# Altium PCB Embeded MCU.PcbDoc
Units mm, origin at the board's own origin, x right, y up, seen from the top; angles counter-clockwise.
Board outline 76.9 x 76.9 mm, 4 copper layers (Top Layer, Int1 (GND), Int2 (PWR), Bottom Layer), stack 1.369 mm thick; 202 components, 107 nets, 1038 pads, 0 vias.
Unrouted connection lines stored in the file: 393.
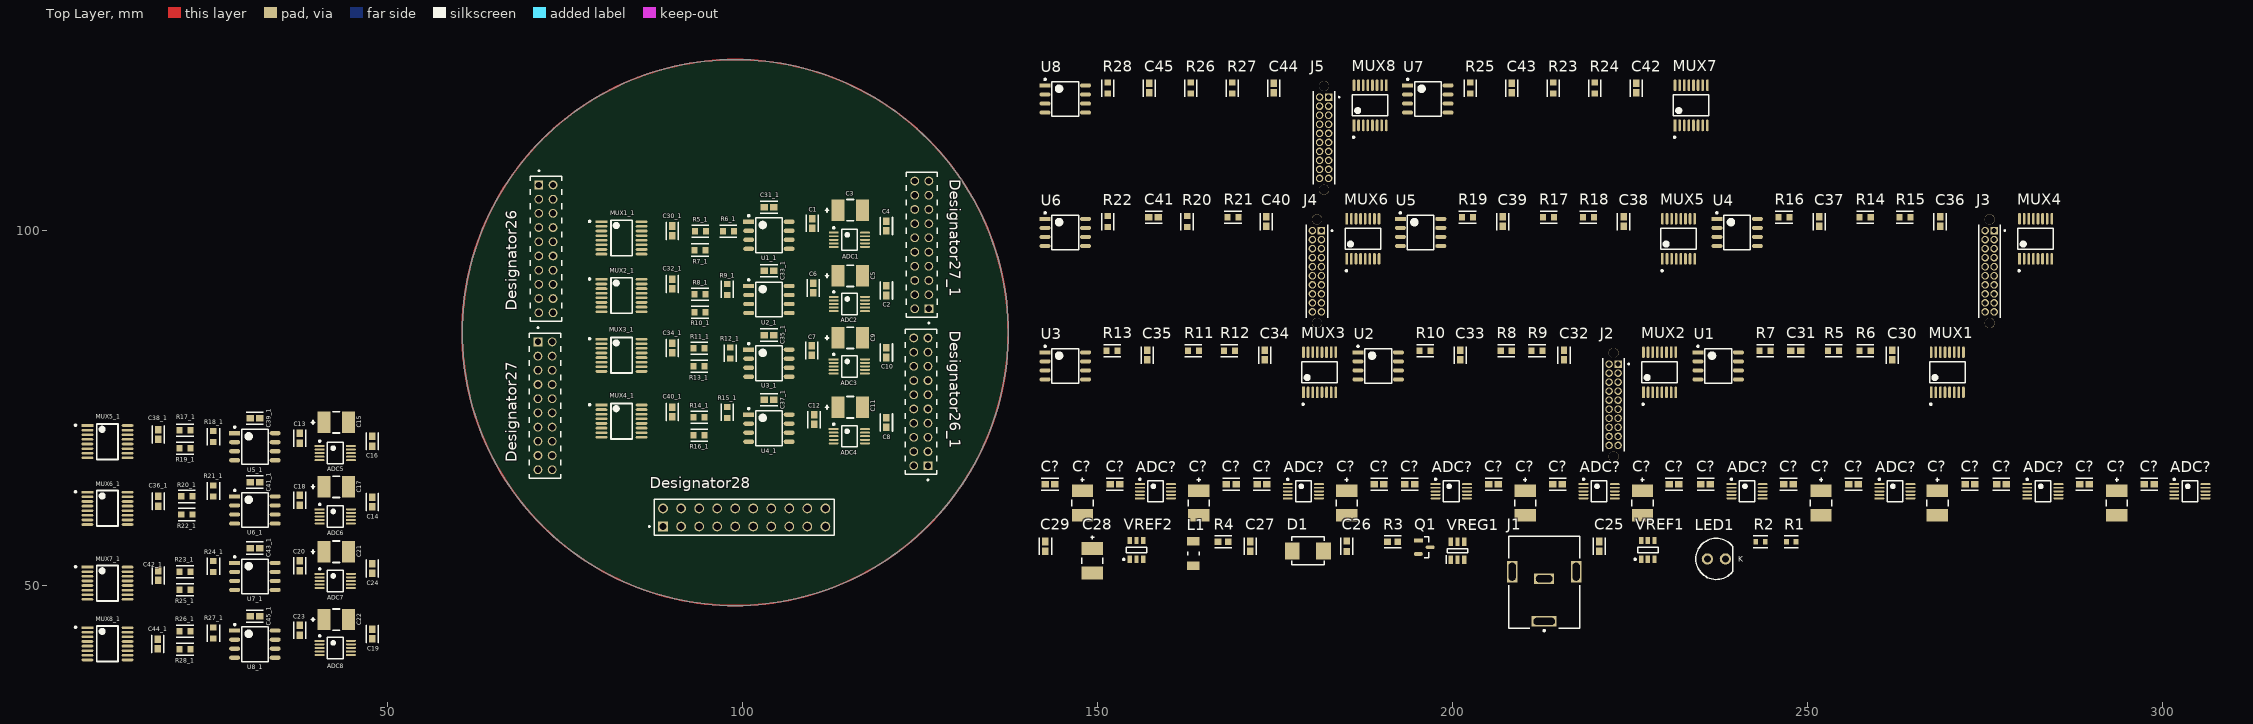
[diagram p0: Top Layer view]
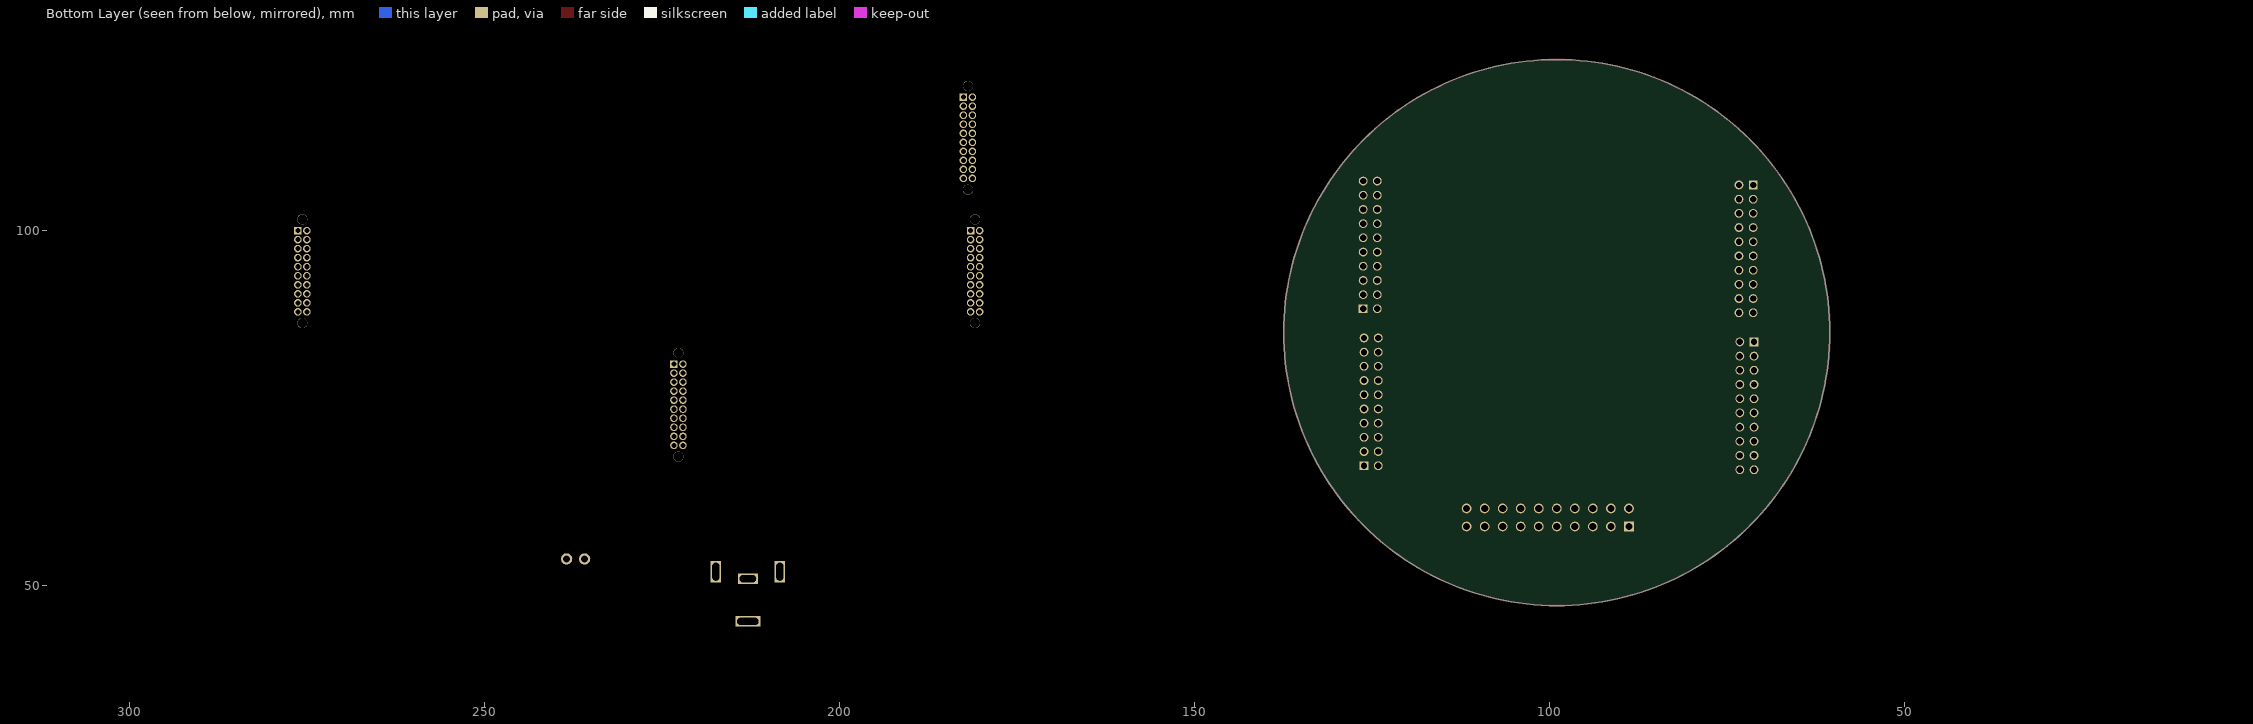
[diagram p1: Bottom Layer view, seen from below]
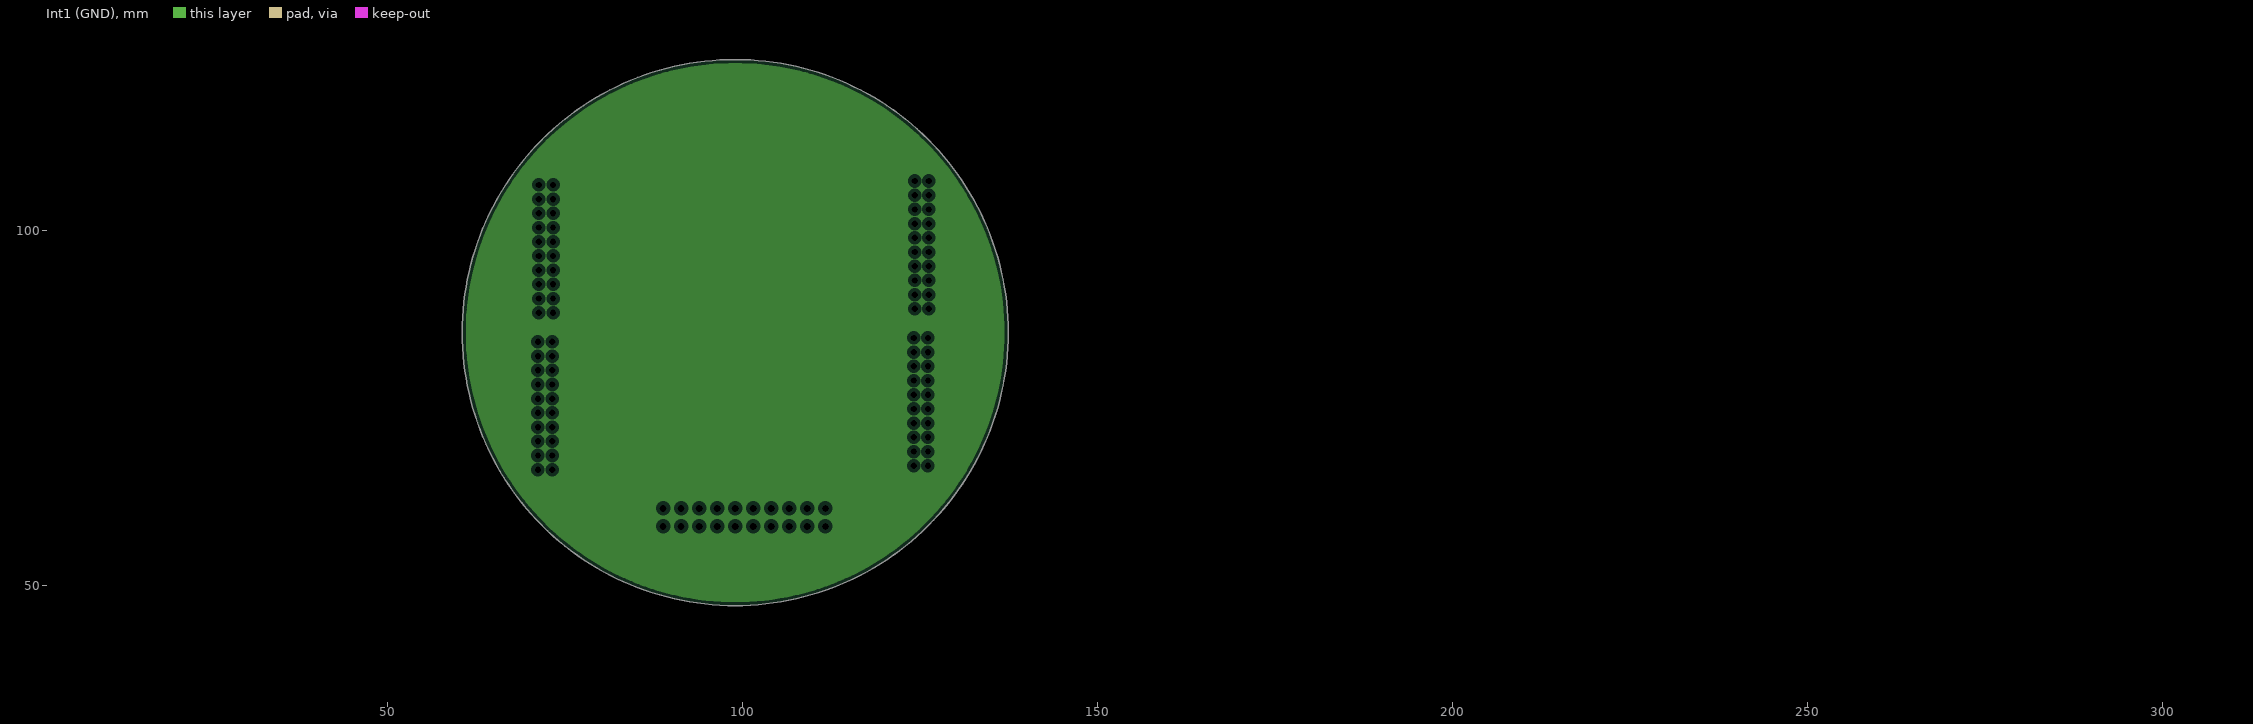
[diagram p2: Int1 (GND), clearances drawn from the general rule]
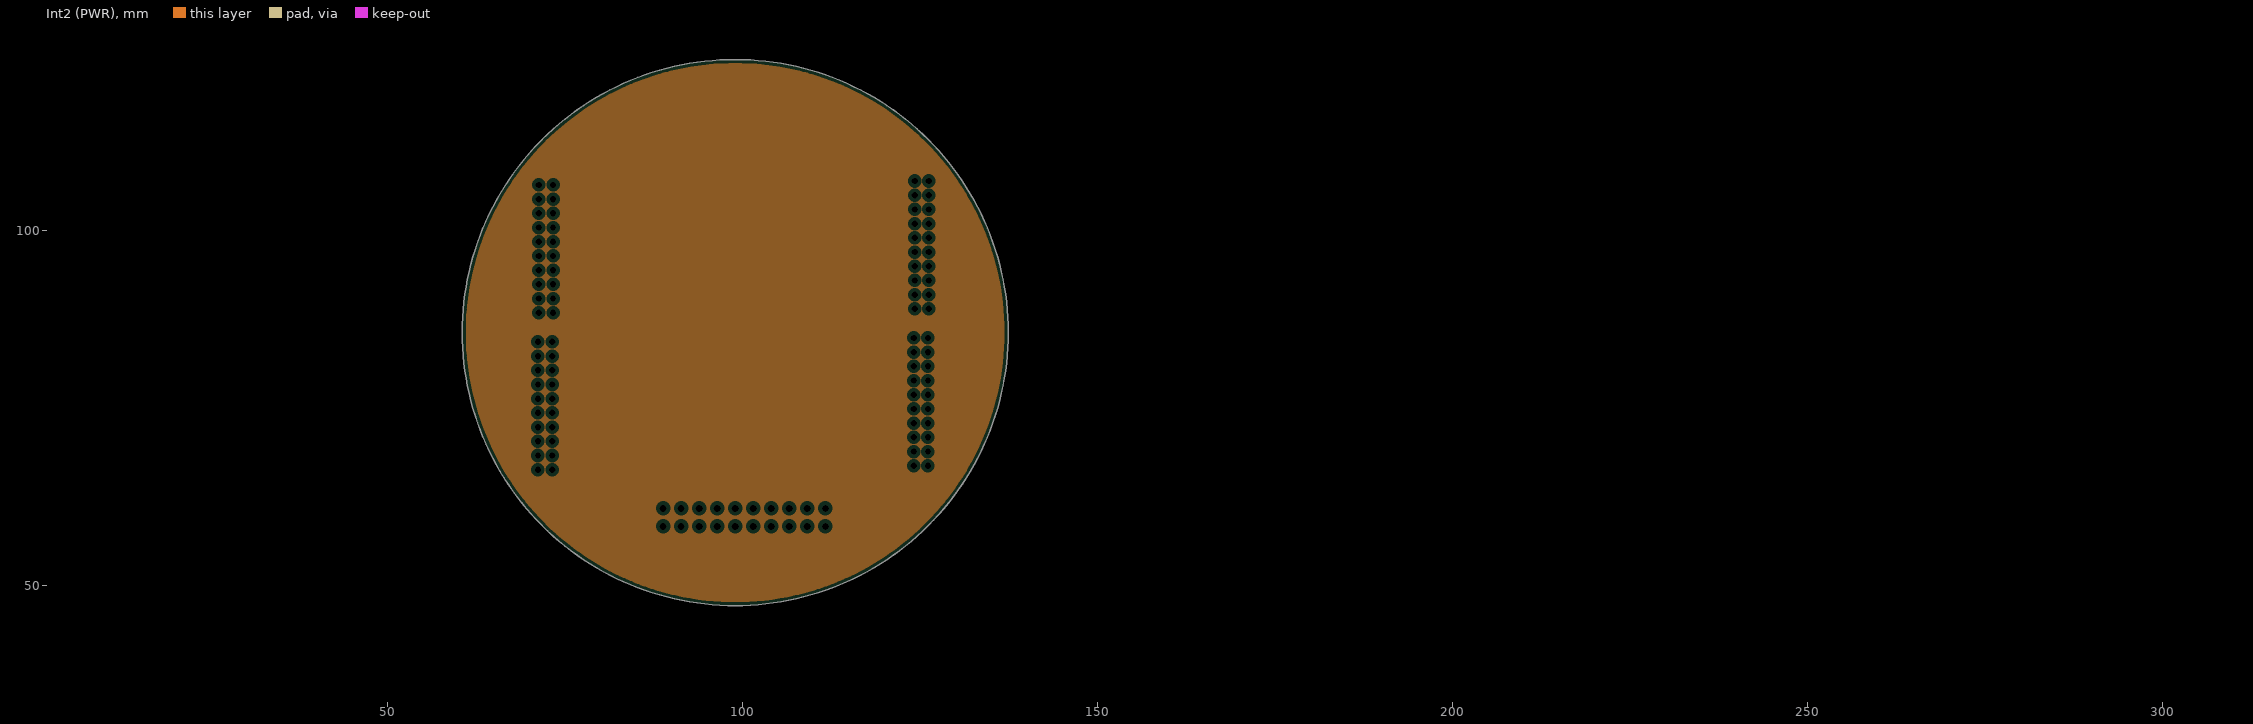
[diagram p3: Int2 (PWR), clearances drawn from the general rule]

## Layer stack, top to bottom
Top Solder: solder mask 0.0254, SM-001, Dk 4
Top Layer: signal copper 0.035
Dielectric 1: prepreg 0.1295, PP-017, Dk 4.3
Dielectric 2: prepreg 0.1295, PP-017, Dk 4.3
Int1 (GND): plane copper 0.035
Dielectric 3: core 0.7112, Core-039, Dk 4.8
Int2 (PWR): plane copper 0.035
Dielectric 4: prepreg 0.1295, PP-017, Dk 4.3
Dielectric 5: prepreg 0.1295, PP-017, Dk 4.3
Bottom Layer: signal copper 0.035
Bottom Solder: solder mask 0.0254, SM-001, Dk 4

## Board outline
60.483,85.598 ccw(c98.933,85.598) 98.933,47.148 ccw(c98.933,85.598) 137.383,85.598 ccw(c98.933,85.598) 98.933,124.048 ccw(c98.933,85.598)

## Design rules (kind name [scope] priority, off if disabled: settings)
Clearance [All] p1: gap=0.254 ignorepadtopadclearanceinfootprint=FALSE except(0: Arc-Hole Track-Hole SMDPad-Hole THPad-Hole Via-Hole Fill-Hole Poly-Hole Region-Hole Text-Hole)
PlaneClearance [All] p1: clearance=0.508
PlaneConnect [All] p1: planeconnectstyle=Relief reliefexpansion=0.508 reliefentries=4 reliefconductorwidth=0.254 reliefairgap=0.254
PolygonConnect [All] p1: connectstyle=Relief reliefconductorwidth=0.254 reliefentries=4 polygonreliefangle="90 Angle" airgapwidth=0.254
RoutingVias [All] p1: holewidth=0.711 width=1.27 viastyle="Through Hole" minholewidth=0.711 minwidth=1.27 maxholewidth=0.711 maxwidth=1.27
SolderMaskExpansion [All] p1: expansion=0.102 istentingtop=FALSE
Width [All] p1: maxlimit=0.5 minlimit=0.2 preferedwidth=0.3
28 further rules are at their usual default settings.

## Classes and differential pairs
component class "Wheatstone bridge part I": C30 C31 C32 C33 C34 C35 J2 MUX1 MUX2 MUX3 R5 R6 R7 R8 R9 R10 R11 R12 R13 U1 U2 U3
component class "Wheatstone bridge part II": C36 C37 C38 C39 C40 C41 J3 J4 MUX4 MUX5 MUX6 R14 R15 R16 R17 R18 R19 R20 R21 R22 U4 U5 U6
component class "Wheatstone bridge part III": C42 C43 C44 C45 J5 MUX7 MUX8 R23 R24 R25 R26 R27 R28 U7 U8
component class "Processing interface": ADC? C?
component class "Power Supply Unit": C25 C26 C27 C28 C29 D1 J1 L1 LED1 Q1 R1 R2 R3 R4 S1 VREF1 VREF2 VREG1

## Components (designator, comment, footprint, x,y, rotation, side; value= is the part's Value field where it differs from the comment)
ADC1 "MCP33141-10-E/MS" MCP33141-10-E/MS 115.01,98.663 r0 top
ADC2 "MCP33141-10-E/MS" MCP33141-10-E/MS 115.01,89.632 r0 top
ADC3 "MCP33141-10-E/MS" MCP33141-10-E/MS 115.002,80.836 r0 top
ADC4 "MCP33141-10-E/MS" MCP33141-10-E/MS 115.002,71.001 r0 top
ADC5 "MCP33141-10-E/MS" MCP33141-10-E/MS 42.612,68.623 r0 top
ADC6 "MCP33141-10-E/MS" MCP33141-10-E/MS 42.612,59.709 r0 top
ADC7 "MCP33141-10-E/MS" MCP33141-10-E/MS 42.612,50.625 r0 top
ADC8 "MCP33141-10-E/MS" MCP33141-10-E/MS 42.612,41.197 r0 top
ADC? "MCP33141-10-E/MS" MCP33141-10-E/MS 178.943,63.246 r0 top
ADC? "MCP33141-10-E/MS" MCP33141-10-E/MS 262.255,63.246 r0 top
ADC? "MCP33141-10-E/MS" MCP33141-10-E/MS 241.427,63.246 r0 top
ADC? "MCP33141-10-E/MS" MCP33141-10-E/MS 220.599,63.246 r0 top
ADC? "MCP33141-10-E/MS" MCP33141-10-E/MS 158.115,63.246 r0 top
ADC? "MCP33141-10-E/MS" MCP33141-10-E/MS 199.771,63.246 r0 top
ADC? "MCP33141-10-E/MS" MCP33141-10-E/MS 283.083,63.246 r0 top
ADC? "MCP33141-10-E/MS" MCP33141-10-E/MS 303.784,63.246 r0 top
C1 "CC0603KPX7R7BB105" FP-CC0603-DA-IPC_B 109.782,100.969 r270 top value=1uF
C2 "CC0603JRX7R9BB104" FP-CC0603-DA-IPC_B 120.209,91.495 r270 top value=100nF
C3 "293D106X9016B2TE3" FP-293D-B-MFG 115.129,102.83 r180 top value=10uF
C4 "CC0603JRX7R9BB104" FP-CC0603-DA-IPC_B 120.209,100.588 r90 top value=100nF
C5 "293D106X9016B2TE3" FP-293D-B-MFG 115.129,93.586 r180 top value=10uF
C6 "CC0603KPX7R7BB105" FP-CC0603-DA-IPC_B 109.909,91.881 r90 top value=1uF
C7 "CC0603KPX7R7BB105" FP-CC0603-DA-IPC_B 109.728,83.073 r270 top value=1uF
C8 "CC0603JRX7R9BB104" FP-CC0603-DA-IPC_B 120.209,72.948 r270 top value=100nF
C9 "293D106X9016B2TE3" FP-293D-B-MFG 115.129,84.851 r180 top value=10uF
C10 "CC0603JRX7R9BB104" FP-CC0603-DA-IPC_B 120.209,82.765 r90 top value=100nF
C11 "293D106X9016B2TE3" FP-293D-B-MFG 115.129,75.083 r180 top value=10uF
C12 "CC0603KPX7R7BB105" FP-CC0603-DA-IPC_B 110.036,73.338 r90 top value=1uF
C13 "CC0603KPX7R7BB105" FP-CC0603-DA-IPC_B 37.592,70.719 r270 top value=1uF
C14 "CC0603JRX7R9BB104" FP-CC0603-DA-IPC_B 47.819,61.722 r270 top value=100nF
C15 "293D106X9016B2TE3" FP-293D-B-MFG 42.739,72.951 r180 top value=10uF
C16 "CC0603JRX7R9BB104" FP-CC0603-DA-IPC_B 47.819,70.3 r90 top value=100nF
C17 "293D106X9016B2TE3" FP-293D-B-MFG 42.739,63.871 r180 top value=10uF
C18 "CC0603KPX7R7BB105" FP-CC0603-DA-IPC_B 37.592,61.992 r90 top value=1uF
C19 "CC0603JRX7R9BB104" FP-CC0603-DA-IPC_B 47.819,43.172 r270 top value=100nF
C20 "CC0603KPX7R7BB105" FP-CC0603-DA-IPC_B 37.592,52.765 r270 top value=1uF
C21 "293D106X9016B2TE3" FP-293D-B-MFG 42.739,54.737 r180 top value=10uF
C22 "293D106X9016B2TE3" FP-293D-B-MFG 42.739,45.188 r180 top value=10uF
C23 "CC0603KPX7R7BB105" FP-CC0603-DA-IPC_B 37.592,43.672 r90 top value=1uF
C24 "CC0603JRX7R9BB104" FP-CC0603-DA-IPC_B 47.819,52.384 r90 top value=100nF
C25 "CC0603KRX7R5BB225" FP-CC0603-DA-IPC_B 220.599,55.499 r90 top value=2.2uF
C26 "GRM188R71E224KA88D" FP-GRM188-0_1-e0_2_0_5-IPC_B 185.039,55.499 r90 top value=220nF
C27 "CC0603JRX7R9BB104" FP-CC0603-DA-IPC_B 171.45,55.499 r90 top value=100nF
C28 "293D106X9016B2TE3" FP-293D-B-MFG 149.225,53.467 r90 top value=10uF
C29 "CC0603KRX7R5BB225" FP-CC0603-DA-IPC_B 142.621,55.499 r90 top value=2.2uF
C30 "CC0603JRX7R9BB104" FP-CC0603-DA-IPC_B 261.874,82.423 r90 top value=100nF
C30_1 "CC0603JRX7R9BB104" FP-CC0603-DA-IPC_B 90.069,99.93 r270 top value=100nF (schematic designator C30)
C31 "CC0603JRX7R9BB104" FP-CC0603-DA-IPC_B 248.285,83.058 r0 top value=100nF
C31_1 "CC0603JRX7R9BB104" FP-CC0603-DA-IPC_B 103.686,103.253 r0 top value=100nF (schematic designator C31)
C32 "CC0603JRX7R9BB104" FP-CC0603-DA-IPC_B 215.646,82.423 r90 top value=100nF
C32_1 "CC0603JRX7R9BB104" FP-CC0603-DA-IPC_B 90.069,92.414 r270 top value=100nF (schematic designator C32)
C33 "CC0603JRX7R9BB104" FP-CC0603-DA-IPC_B 201.041,82.423 r90 top value=100nF
C33_1 "CC0603JRX7R9BB104" FP-CC0603-DA-IPC_B 103.686,94.294 r0 top value=100nF (schematic designator C33)
C34 "CC0603JRX7R9BB104" FP-CC0603-DA-IPC_B 173.482,82.423 r90 top value=100nF
C34_1 "CC0603JRX7R9BB104" FP-CC0603-DA-IPC_B 90.069,83.403 r270 top value=100nF (schematic designator C34)
C35 "CC0603JRX7R9BB104" FP-CC0603-DA-IPC_B 156.972,82.423 r90 top value=100nF
C35_1 "CC0603JRX7R9BB104" FP-CC0603-DA-IPC_B 103.686,85.249 r0 top value=100nF (schematic designator C35)
C36 "CC0603JRX7R9BB104" FP-CC0603-DA-IPC_B 268.605,101.219 r90 top value=100nF
C36_1 "CC0603JRX7R9BB104" FP-CC0603-DA-IPC_B 17.679,61.842 r270 top value=100nF (schematic designator C36)
C37 "CC0603JRX7R9BB104" FP-CC0603-DA-IPC_B 251.587,101.219 r90 top value=100nF
C37_1 "CC0603JRX7R9BB104" FP-CC0603-DA-IPC_B 103.686,76.124 r0 top value=100nF (schematic designator C37)
C38 "CC0603JRX7R9BB104" FP-CC0603-DA-IPC_B 224.028,101.219 r90 top value=100nF
C38_1 "CC0603JRX7R9BB104" FP-CC0603-DA-IPC_B 17.679,71.233 r270 top value=100nF (schematic designator C38)
C39 "CC0603JRX7R9BB104" FP-CC0603-DA-IPC_B 207.01,101.219 r90 top value=100nF
C39_1 "CC0603JRX7R9BB104" FP-CC0603-DA-IPC_B 31.295,73.547 r0 top value=100nF (schematic designator C39)
C40 "CC0603JRX7R9BB104" FP-CC0603-DA-IPC_B 173.736,101.219 r90 top value=100nF
C40_1 "CC0603JRX7R9BB104" FP-CC0603-DA-IPC_B 90.069,74.406 r270 top value=100nF (schematic designator C40)
C41 "CC0603JRX7R9BB104" FP-CC0603-DA-IPC_B 157.861,101.854 r0 top value=100nF
C41_1 "CC0603JRX7R9BB104" FP-CC0603-DA-IPC_B 31.295,64.55 r0 top value=100nF (schematic designator C41)
C42 "CC0603JRX7R9BB104" FP-CC0603-DA-IPC_B 225.806,120.015 r90 top value=100nF
C42_1 "CC0603JRX7R9BB104" FP-CC0603-DA-IPC_B 17.679,51.411 r270 top value=100nF (schematic designator C42)
C43 "CC0603JRX7R9BB104" FP-CC0603-DA-IPC_B 208.28,120.015 r90 top value=100nF
C43_1 "CC0603JRX7R9BB104" FP-CC0603-DA-IPC_B 31.295,55.251 r0 top value=100nF (schematic designator C43)
C44 "CC0603JRX7R9BB104" FP-CC0603-DA-IPC_B 174.752,120.015 r90 top value=100nF
C44_1 "CC0603JRX7R9BB104" FP-CC0603-DA-IPC_B 17.61,41.763 r270 top value=100nF (schematic designator C44)
C45 "CC0603JRX7R9BB104" FP-CC0603-DA-IPC_B 157.226,120.015 r90 top value=100nF
C45_1 "CC0603JRX7R9BB104" FP-CC0603-DA-IPC_B 31.295,45.658 r0 top value=100nF (schematic designator C45)
C? "293D106X9016B2TE3" FP-293D-B-MFG 185.039,61.595 r90 top value=10uF
C? "293D106X9016B2TE3" FP-293D-B-MFG 293.497,61.595 r90 top value=10uF
C? "CC0603JRX7R9BB104" FP-CC0603-DA-IPC_B 235.585,64.262 r0 top value=100nF
C? "CC0603JRX7R9BB104" FP-CC0603-DA-IPC_B 143.256,64.262 r0 top value=100nF
C? "293D106X9016B2TE3" FP-293D-B-MFG 251.841,61.595 r90 top value=10uF
C? "CC0603KPX7R7BB105" FP-CC0603-DA-IPC_B 272.796,64.262 r0 top value=1uF
C? "CC0603JRX7R9BB104" FP-CC0603-DA-IPC_B 173.101,64.262 r0 top value=100nF
C? "293D106X9016B2TE3" FP-293D-B-MFG 226.695,61.595 r90 top value=10uF
C? "CC0603JRX7R9BB104" FP-CC0603-DA-IPC_B 193.929,64.262 r0 top value=100nF
C? "293D106X9016B2TE3" FP-293D-B-MFG 164.211,61.595 r90 top value=10uF
C? "CC0603JRX7R9BB104" FP-CC0603-DA-IPC_B 277.241,64.262 r0 top value=100nF
C? "CC0603JRX7R9BB104" FP-CC0603-DA-IPC_B 288.925,64.262 r0 top value=100nF
C? "CC0603KPX7R7BB105" FP-CC0603-DA-IPC_B 189.611,64.262 r0 top value=1uF
C? "293D106X9016B2TE3" FP-293D-B-MFG 268.224,61.595 r90 top value=10uF
C? "CC0603KPX7R7BB105" FP-CC0603-DA-IPC_B 298.069,64.262 r0 top value=1uF
C? "293D106X9016B2TE3" FP-293D-B-MFG 147.828,61.595 r90 top value=10uF
C? "CC0603KPX7R7BB105" FP-CC0603-DA-IPC_B 256.413,64.262 r0 top value=1uF
C? "CC0603KPX7R7BB105" FP-CC0603-DA-IPC_B 168.783,64.262 r0 top value=1uF
C? "CC0603KPX7R7BB105" FP-CC0603-DA-IPC_B 231.14,64.262 r0 top value=1uF
C? "CC0603JRX7R9BB104" FP-CC0603-DA-IPC_B 205.74,64.262 r0 top value=100nF
C? "CC0603JRX7R9BB104" FP-CC0603-DA-IPC_B 247.269,64.262 r0 top value=100nF
C? "293D106X9016B2TE3" FP-293D-B-MFG 210.185,61.595 r90 top value=10uF
C? "CC0603KPX7R7BB105" FP-CC0603-DA-IPC_B 214.757,64.262 r0 top value=1uF
C? "CC0603KPX7R7BB105" FP-CC0603-DA-IPC_B 152.4,64.262 r0 top value=1uF
D1 "SMBJ20CA" FP-SMBJ-CA-MFG 179.578,54.864 r0 top
Designator26 "Comment" SAMTEC_MTMM-110-07-G-D-290 72.279,97.384 r270 top
Designator26_1 "Comment" SAMTEC_MTMM-110-07-G-D-290 125.079,75.844 r90 top
Designator27 "Comment" SAMTEC_MTMM-110-07-G-D-290 72.152,75.286 r270 top
Designator27_1 "Comment" SAMTEC_MTMM-110-07-G-D-290 125.206,97.942 r90 top
Designator28 "Comment" SAMTEC_DW-10-XX-X-D-XXX 88.773,58.293 r0 top
J1 "PJ-063AH" CUI-PJ-063AH_V 212.852,50.927 r90 top
J2 "SFC-110-T1-F-D-A" SFC-110-T1-F-D-A-Footprint-2 222.631,75.438 r90 top
J3 "SFC-110-T1-F-D-A" SFC-110-T1-F-D-A-Footprint-2 275.59,94.234 r90 top
J4 "SFC-110-T1-F-D-A" SFC-110-T1-F-D-A-Footprint-2 180.848,94.234 r90 top
J5 "SFC-110-T1-F-D-A" SFC-110-T1-F-D-A-Footprint-2 181.864,113.03 r90 top
L1 "ILSB1206ER4R7K" INDC3216X14N 163.449,54.483 r90 top value=4.7uH
LED1 "151053GS03000" "Type 5mm" 237.109,53.721 r0 top
MUX1 "TMUX1208PWR" FP-PW0016A-IPC_B 269.621,80.01 r90 top
MUX1_1 "TMUX1208PWR" FP-PW0016A-IPC_B 82.923,98.928 r0 top (schematic designator MUX1)
MUX2 "TMUX1208PWR" FP-PW0016A-IPC_B 229.108,80.01 r90 top
MUX2_1 "TMUX1208PWR" FP-PW0016A-IPC_B 82.923,90.816 r0 top (schematic designator MUX2)
MUX3 "TMUX1208PWR" FP-PW0016A-IPC_B 181.229,80.01 r90 top
MUX3_1 "TMUX1208PWR" FP-PW0016A-IPC_B 82.923,82.401 r0 top (schematic designator MUX3)
MUX4 "TMUX1208PWR" FP-PW0016A-IPC_B 282.067,98.806 r90 top
MUX4_1 "TMUX1208PWR" FP-PW0016A-IPC_B 82.923,73.126 r0 top (schematic designator MUX4)
MUX5 "TMUX1208PWR" FP-PW0016A-IPC_B 231.775,98.806 r90 top
MUX5_1 "TMUX1208PWR" FP-PW0016A-IPC_B 10.533,70.231 r0 top (schematic designator MUX5)
MUX6 "TMUX1208PWR" FP-PW0016A-IPC_B 187.325,98.806 r90 top
MUX6_1 "TMUX1208PWR" FP-PW0016A-IPC_B 10.533,60.84 r0 top (schematic designator MUX6)
MUX7 "TMUX1208PWR" FP-PW0016A-IPC_B 233.553,117.602 r90 top
MUX7_1 "TMUX1208PWR" FP-PW0016A-IPC_B 10.533,50.3 r0 top (schematic designator MUX7)
MUX8 "TMUX1208PWR" FP-PW0016A-IPC_B 188.341,117.602 r90 top
MUX8_1 "TMUX1208PWR" FP-PW0016A-IPC_B 10.533,41.773 r0 top (schematic designator MUX8)
Q1 "IRLML9303TRPBF" FP-Micro3-IPC_C 195.961,55.372 r0 top
R1 "AC0603FR-072K4L" FP-AC0603-IPC_C 247.65,56.134 r0 top value=2.4kR
R2 "AC0603FR-075K1L" FP-AC0603-IPC_C 243.332,56.134 r0 top value=5.1kR
R3 "CRCW060322K1FKEA" CRCW060322K1FKEA-Footprint-2 191.516,56.134 r0 top value=22K1
R4 "CRCW060388K7FKEB" FP-CRCW0603-e3-IPC_B 167.64,56.134 r0 top value=88K7
R5 "RT0603BRD0710KL" FP-RT0603-IPC_B 253.619,83.058 r0 top value=10K
R5_1 "RT0603BRD0710KL" FP-RT0603-IPC_B 94.034,99.883 r0 top value=10K (schematic designator R5)
R6 "RT0603BRD0710KL" FP-RT0603-IPC_B 258.064,83.058 r0 top value=10K
R6_1 "RT0603BRD0710KL" FP-RT0603-IPC_B 97.971,99.883 r0 top value=10K (schematic designator R6)
R7 "RT0603BRD0710KL" FP-RT0603-IPC_B 243.967,83.058 r0 top value=10K
R7_1 "RT0603BRD0710KL" FP-RT0603-IPC_B 93.972,97.219 r0 top value=10K (schematic designator R7)
R8 "RT0603BRD0710KL" FP-RT0603-IPC_B 207.518,83.058 r0 top value=10K
R8_1 "RT0603BRD0710KL" FP-RT0603-IPC_B 93.972,91.002 r0 top value=10K (schematic designator R8)
R9 "RT0603BRD0710KL" FP-RT0603-IPC_B 211.836,83.058 r0 top value=10K
R9_1 "RT0603BRD0710KL" FP-RT0603-IPC_B 97.79,91.679 r90 top value=10K (schematic designator R9)
R10 "RT0603BRD0710KL" FP-RT0603-IPC_B 196.088,83.058 r0 top value=10K
R10_1 "RT0603BRD0710KL" FP-RT0603-IPC_B 93.972,88.462 r0 top value=10K (schematic designator R10)
R11 "RT0603BRD0710KL" FP-RT0603-IPC_B 163.449,83.058 r0 top value=10K
R11_1 "RT0603BRD0710KL" FP-RT0603-IPC_B 93.845,83.376 r0 top value=10K (schematic designator R11)
R12 "RT0603BRD0710KL" FP-RT0603-IPC_B 168.529,83.058 r0 top value=10K
R12_1 "RT0603BRD0710KL" FP-RT0603-IPC_B 98.225,82.699 r90 top value=10K (schematic designator R12)
R13 "RT0603BRD0710KL" FP-RT0603-IPC_B 152.019,83.058 r0 top value=10K
R13_1 "RT0603BRD0710KL" FP-RT0603-IPC_B 93.845,80.836 r0 top value=10K (schematic designator R13)
R14 "RT0603BRD0710KL" FP-RT0603-IPC_B 258.064,101.854 r0 top value=10K
R14_1 "RT0603BRD0710KL" FP-RT0603-IPC_B 93.846,73.683 r0 top value=10K (schematic designator R14)
R15 "RT0603BRD0710KL" FP-RT0603-IPC_B 263.652,101.854 r0 top value=10K
R15_1 "RT0603BRD0710KL" FP-RT0603-IPC_B 97.835,74.359 r90 top value=10K (schematic designator R15)
R16 "RT0603BRD0710KL" FP-RT0603-IPC_B 246.634,101.854 r0 top value=10K
R16_1 "RT0603BRD0710KL" FP-RT0603-IPC_B 93.846,71.143 r0 top value=10K (schematic designator R16)
R17 "RT0603BRD0710KL" FP-RT0603-IPC_B 213.487,101.854 r0 top value=10K
R17_1 "RT0603BRD0710KL" FP-RT0603-IPC_B 21.455,71.856 r0 top value=10K (schematic designator R17)
R18 "RT0603BRD0710KL" FP-RT0603-IPC_B 219.075,101.854 r0 top value=10K
R18_1 "RT0603BRD0710KL" FP-RT0603-IPC_B 25.453,70.951 r90 top value=10K (schematic designator R18)
R19 "RT0603BRD0710KL" FP-RT0603-IPC_B 202.057,101.854 r0 top value=10K
R19_1 "RT0603BRD0710KL" FP-RT0603-IPC_B 21.455,69.316 r0 top value=10K (schematic designator R19)
R20 "RT0603BRD0710KL" FP-RT0603-IPC_B 162.56,101.219 r90 top value=10K
R20_1 "RT0603BRD0710KL" FP-RT0603-IPC_B 21.702,62.519 r0 top value=10K (schematic designator R20)
R21 "RT0603BRD0710KL" FP-RT0603-IPC_B 169.037,101.854 r0 top value=10K
R21_1 "RT0603BRD0710KL" FP-RT0603-IPC_B 25.453,63.295 r90 top value=10K (schematic designator R21)
R22 "RT0603BRD0710KL" FP-RT0603-IPC_B 151.384,101.219 r90 top value=10K
R22_1 "RT0603BRD0710KL" FP-RT0603-IPC_B 21.702,59.979 r0 top value=10K (schematic designator R22)
R23 "RT0603BRD0710KL" FP-RT0603-IPC_B 214.122,120.015 r90 top value=10K
R23_1 "RT0603BRD0710KL" FP-RT0603-IPC_B 21.455,51.936 r0 top value=10K (schematic designator R23)
R24 "RT0603BRD0710KL" FP-RT0603-IPC_B 219.964,120.015 r90 top value=10K
R24_1 "RT0603BRD0710KL" FP-RT0603-IPC_B 25.453,52.672 r90 top value=10K (schematic designator R24)
R25 "RT0603BRD0710KL" FP-RT0603-IPC_B 202.438,120.015 r90 top value=10K
R25_1 "RT0603BRD0710KL" FP-RT0603-IPC_B 21.455,49.38 r0 top value=10K (schematic designator R25)
R26 "RT0603BRD0710KL" FP-RT0603-IPC_B 163.068,120.015 r90 top value=10K
R26_1 "RT0603BRD0710KL" FP-RT0603-IPC_B 21.455,43.552 r0 top value=10K (schematic designator R26)
R27 "RT0603BRD0710KL" FP-RT0603-IPC_B 168.91,120.015 r90 top value=10K
R27_1 "RT0603BRD0710KL" FP-RT0603-IPC_B 25.453,43.272 r90 top value=10K (schematic designator R27)
R28 "RT0603BRD0710KL" FP-RT0603-IPC_B 151.384,120.015 r90 top value=10K
R28_1 "RT0603BRD0710KL" FP-RT0603-IPC_B 21.455,41.012 r0 top value=10K (schematic designator R28)
U1 "MCP6N11-100E/SN" MCP6N11-100E/SN 237.363,80.899 r0 top
U1_1 "MCP6N11-100E/SN" MCP6N11-100E/SN 103.686,99.298 r0 top (schematic designator U1)
U2 "MCP6N11-100E/SN" MCP6N11-100E/SN 189.484,80.899 r0 top
U2_1 "MCP6N11-100E/SN" MCP6N11-100E/SN 103.686,90.267 r0 top (schematic designator U2)
U3 "MCP6N11-100E/SN" MCP6N11-100E/SN 145.415,80.899 r0 top
U3_1 "MCP6N11-100E/SN" MCP6N11-100E/SN 103.686,81.287 r0 top (schematic designator U3)
U4 "MCP6N11-100E/SN" MCP6N11-100E/SN 240.03,99.695 r0 top
U4_1 "MCP6N11-100E/SN" MCP6N11-100E/SN 103.686,72.136 r0 top (schematic designator U4)
U5 "MCP6N11-100E/SN" MCP6N11-100E/SN 195.453,99.695 r0 top
U5_1 "MCP6N11-100E/SN" MCP6N11-100E/SN 31.295,69.528 r0 top (schematic designator U5)
U6 "MCP6N11-100E/SN" MCP6N11-100E/SN 145.415,99.695 r0 top
U6_1 "MCP6N11-100E/SN" MCP6N11-100E/SN 31.295,60.614 r0 top (schematic designator U6)
U7 "MCP6N11-100E/SN" MCP6N11-100E/SN 196.469,118.491 r0 top
U7_1 "MCP6N11-100E/SN" MCP6N11-100E/SN 31.295,51.26 r0 top (schematic designator U7)
U8 "MCP6N11-100E/SN" MCP6N11-100E/SN 145.415,118.491 r0 top
U8_1 "MCP6N11-100E/SN" MCP6N11-100E/SN 31.295,41.721 r0 top (schematic designator U8)
VREF1 "MCP1501T-33E/CHY" SOT95P280X118-6N 227.457,54.991 r90 top
VREF2 "MCP1501T-18E/CHY" MCP1501T-18E/CHY 155.448,54.991 r90 top
VREG1 "LMR50410YFQDBVRQ1" SOT95P280X145-6N 200.66,54.864 r90 top

## Footprints (in the part's own frame and the unit in brackets; to place one, negate y for a bottom-side part, rotate by r counter-clockwise, add the part's x,y. Pads: shape width x height; smd on the part's side, far side on the other; paste and mask are expansions set on the pad)
CRCW060322K1FKEA-Footprint-2 [mm]
  rect 0.958x0.912 smd paste+0 mask+0: 1(-0.727,0) 2(0.727,0)
  silkscreen extent -1.21,-0.86 1.21,0.86, body extent -1.46,-0.71 1.46,0.71, height 0.25
CUI-PJ-063AH_V [mm] "THD, 2-Leads, Body 13x10mm, Height 9mm"
  rect 1.5x3.5 hole 1 slot 3 at 90 deg: 1(-6,0)
  rect 1.5x2.8 hole 1 slot 2.3 at 90 deg: 2(0,0)
  rect 3x1.5 hole 1 slot 2.5 at 0 deg: 3(1,4.5) 4(1,-4.5)
  round 1.4 hole 1.7 unplated: 5(3,0)
  silkscreen extent -7.42,-5 6,5, body extent -7,-5.15 6,5.15, height 9
FP-293D-B-MFG [mm]
  rect 1.8x3 smd paste+0 mask+0: 1(-1.725,0) 2(1.725,0)
  silkscreen extent -0.45,-1.5 3.52,1.5, body extent -2.73,-1.6 2.73,1.6, height 0.25
FP-AC0603-IPC_C [mm]
  rect 0.659x0.812 smd paste+0 mask+0: 1(-0.677,0) 2(0.677,0)
  silkscreen extent -1.01,-0.85 1.01,0.85, body extent -1.11,-0.55 1.11,0.55, height 0.25
FP-CC0603-DA-IPC_B [mm]
  rect 1.058x0.912 smd paste+0 mask+0: 1(-0.677,0) 2(0.677,0)
  silkscreen extent -1.21,-0.86 1.21,0.86, body extent -1.46,-0.71 1.46,0.71, height 0.25
FP-CRCW0603-e3-IPC_B [mm]
  rect 0.935x0.962 smd paste+0 mask+0: 1(-0.715,0) 2(0.715,0)
  silkscreen extent -1.21,-0.86 1.21,0.86, body extent -1.43,-0.73 1.43,0.73, height 0.25
FP-GRM188-0_1-e0_2_0_5-IPC_B [mm]
  rect 0.959x0.912 smd paste+0 mask+0: 1(-0.727,0) 2(0.727,0)
  silkscreen extent -1.21,-0.86 1.21,0.86, body extent -1.46,-0.71 1.46,0.71, height 0.25
FP-Micro3-IPC_C [mm]
  rect 1.274x0.532 smd paste+0 mask+0: 1(-0.835,0.95)
  rrect100% 1.274x0.532 smd paste+0 mask+0: 2(-0.835,-0.95) 3(0.835,0)
  silkscreen extent 0,-1.46 0.65,1.46, body extent -1.57,-1.56 1.57,1.56, height 0.25
FP-PW0016A-IPC_B [mm]
  rect 1.655x0.381 smd paste+0 mask+0: 1(-2.825,2.275)
  rrect100% 1.655x0.381 smd paste+0 mask+0: 2(-2.825,1.625) 3(-2.825,0.975) 4(-2.825,0.325) 5(-2.825,-0.325) 6(-2.825,-0.975) 7(-2.825,-1.625) 8(-2.825,-2.275) 9(2.825,-2.275) 10(2.825,-1.625) 11(2.825,-0.975) 12(2.825,-0.325) 13(2.825,0.325) 14(2.825,0.975) 15(2.825,1.625) 16(2.825,2.275)
  silkscreen extent -4.63,-2.5 1.5,2.5, body extent -3.9,-2.75 3.9,2.75, height 0.25
FP-RT0603-IPC_B [mm]
  rect 0.859x0.912 smd paste+0 mask+0: 1(-0.777,0) 2(0.777,0)
  silkscreen extent -1.21,-0.86 1.21,0.86, body extent -1.46,-0.71 1.46,0.71, height 0.25
FP-SMBJ-CA-MFG [mm]
  rect 2.1x2.4 smd paste+0 mask+0: 1(-2.2,0) 2(2.2,0)
  silkscreen extent -2.28,-1.97 2.28,1.97, body extent -2.72,-2.07 2.72,2.07, height 0.25
INDC3216X14N [mm] "Chip Inductor, 2-Leads, Body 3,20x1,60mm, IPC Medium Density"
  rect 1.2x1.8 smd: 1(-1.7,0) 2(1.7,0)
  silkscreen extent -0.25,-0.8 0.25,0.8, body extent -1.7,-0.9 1.7,0.9, height 1.4
MCP6N11-100E/SN [mm] "SOIC, 8-Leads, Body 4,90x3,90mm, Pitch 1,27mm, IPC Medium Density"
  rect 1.55x0.6 smd: 1(-2.85,1.905)
  oval 1.55x0.6 smd: 2(-2.85,0.635) 3(-2.85,-0.635) 4(-2.85,-1.905) 5(2.85,-1.905) 6(2.85,-0.635) 7(2.85,0.635) 8(2.85,1.905)
  silkscreen extent -2.97,-2.45 1.88,2.88, body extent -3,-2.45 3,2.45, height 1.75
MCP1501T-18E/CHY [mm] "SOT23, 6-Leads, Body 2,90x2,80mm, Pitch 0,95mm, IPC Medium Density"
  rect 1.05x0.6 smd: 1(-1.325,0.95) 2(-1.325,0) 3(-1.325,-0.95) 4(1.325,-0.95) 5(1.325,0) 6(1.325,0.95)
  silkscreen extent -1.45,-1.45 0.4,1.92, body extent -1.4,-1.45 1.4,1.45, height 1.17
MCP33141-10-E/MS [mm] "TSSOP, 10-Leads, Body 3,00x3,00mm, Pitch 0,50mm, IPC Low Density"
  rect 1.4x0.28 smd: 1(-2.2,1)
  oval 1.4x0.28 smd: 2(-2.2,0.5) 3(-2.2,0) 4(-2.2,-0.5) 5(-2.2,-1) 6(2.2,-1) 7(2.2,-0.5) 8(2.2,0) 9(2.2,0.5) 10(2.2,1)
  silkscreen extent -2.32,-1.5 1.1,1.81, body extent -2.45,-1.5 2.45,1.5, height 1.1
SAMTEC_DW-10-XX-X-D-XXX [mm]
  rect 1.37x1.37 hole 1.02: 01(0,0)
  round 1.37 hole 1.02: 02(0,2.54) 03(2.54,0) 04(2.54,2.54) 05(5.08,0) 06(5.08,2.54) 07(7.62,0) 08(7.62,2.54) 09(10.16,0) 10(10.16,2.54) 11(12.7,0) 12(12.7,2.54) 13(15.24,0) 14(15.24,2.54) 15(17.78,0) 16(17.78,2.54) 17(20.32,0) 18(20.32,2.54) 19(22.86,0) 20(22.86,2.54)
  silkscreen extent -2.02,-1.27 24.13,3.81
SAMTEC_MTMM-110-07-G-D-290 [mm]
  rect 1.24x1.24 hole 0.89: 01(-9,-1)
  round 1.24 hole 0.89: 02(-9,1) 03(-7,-1) 04(-7,1) 05(-5,-1) 06(-5,1) 07(-3,-1) 08(-3,1) 09(-1,-1) 10(-1,1) 11(1,-1) 12(1,1) 13(3,-1) 14(3,1) 15(5,-1) 16(5,1) 17(7,-1) 18(7,1) 19(9,-1) 20(9,1)
  silkscreen extent -11.1,-2.2 10.2,2.2
SFC-110-T1-F-D-A-Footprint-2 [mm]
  rect 1.06x1.06 hole 0.71: 1(5.715,-0.635)
  round 1.06 hole 0.71: 2(5.715,0.635) 3(4.445,-0.635) 4(4.445,0.635) 5(3.175,-0.635) 6(3.175,0.635) 7(1.905,-0.635) 8(1.905,0.635) 9(0.635,-0.635) 10(0.635,0.635) 11(-0.635,-0.635) 12(-0.635,0.635) 13(-1.905,-0.635) 14(-1.905,0.635) 15(-3.175,-0.635) 16(-3.175,0.635) 17(-4.445,-0.635) 18(-4.445,0.635) 19(-5.715,-0.635) 20(-5.715,0.635)
  round 1.42 hole 1.42 unplated: ""(-7.305,0) ""(7.305,0)
  silkscreen extent -6.54,-2.22 6.54,1.53, body extent -7.94,-1.52 7.94,2.16, height 4.57
SOT95P280X118-6N [mm] "SOT23, 6-Leads, Body 2,90x2,80mm, Pitch 0,95mm, IPC Medium Density"
  rect 1.05x0.6 smd: 1(-1.325,0.95) 2(-1.325,0) 3(-1.325,-0.95) 4(1.325,-0.95) 5(1.325,0) 6(1.325,0.95)
  silkscreen extent -1.45,-1.45 0.4,1.92, body extent -1.4,-1.45 1.4,1.45, height 1.17
SOT95P280X145-6N [mm]
  rect 1.2x0.6 smd: 1(-1.25,0.95) 2(-1.25,0) 3(-1.25,-0.95) 4(1.25,-0.95) 5(1.25,0) 6(1.25,0.95)
  silkscreen extent -1.85,-1.45 0.3,1.6, body extent -1.4,-1.45 1.4,1.45, height 1.45
"Type 5mm" [mm] "THT, LED-5mm, 2pin- Body 5.8mm"
  round 1.6 hole 1: 1(1.27,0) 2(-1.27,0)
  silkscreen extent -2.9,-2.9 2.29,2.9, body extent -2.9,-2.9 2.5,2.9, height 11.7

## Part data
ADC1 ADC2 ADC3 ADC4 ADC5 ADC6 ADC7 ADC8 ADC? ADC? ADC? ADC? ADC? ADC? ADC? ADC?: library part CMP-020-00028-10, "ADC Single SAR 1Msps 12-bit Serial Microwire/SPI 10-Pin MSOP Tray", Architecture=SAR, Data Interface=SPI, Resolution="12 Bits", Sampling rate=1M
C1 C6 C7 C12 C13 C18 C20 C23 C? C? C? C? C? C? C? C?: library part CMP-001-00101-1, "0603 1 uF 16 V ±10 % Tolerance X7R SMT Multilayer Ceramic Capacitor", Case Code (Imperial)=0603, Case Code (Metric)=1608, Dielectric=X7R, Max Operating Temperature=125°C, Min Operating Temperature=-55°C, Resistor Type=Ceramic, Tolerance=10%, Voltage Rating (DC)=16V, Case/Package=0603, Construction=Flat, Depth=0.8mm, Halogen Free="Halogen Free", Height=0.8mm, Lead Free="Lead Free", Length=1.6mm, Mounting Technology="Surface Mount", Packaging="Tape and Reel", Radiation Hardening=No, RoHS Compliant=Yes, Termination=SMD/SMT, Weight=7.1E-05oz
C2 C4 C8 C10 C14 C16 C19 C24 C27 C30 C30_1 C31 C31_1 C32 C32_1 C33 C33_1 C34 C34_1 C35 C35_1 C36 C36_1 C37 C37_1 C38 C38_1 C39 C39_1 C40 C40_1 C41 C41_1 C42 C42_1 C43 C43_1 C44 C44_1 C45 C45_1 C? C? C? C? C? C? C? C?: library part CMP-001-00097-1, "0603 0.1 uF 50 V ±5 % Tolerance X7R SMT Multilayer Ceramic Capacitor", Case Code (Imperial)=0603, Case Code (Metric)=1608, Dielectric=X7R, Max Operating Temperature=125°C, Min Operating Temperature=-55°C, Resistor Type=Ceramic, Tolerance=5%, Voltage Rating=50V, Case/Package=0603, Construction=Flat, Depth=0.8mm, Halogen Free="Halogen Free", Height=0.8mm, Lead Free="Lead Free", Length=0.063inch, Mounting Technology="Surface Mount", Packaging="Tape and Reel", Pins=2, Radiation Hardening=No, RoHS Compliant=Yes, Series=CC, Termination=SMD/SMT, Thickness=0.035inch, Voltage Rating (DC)=50V, Weight=7.1E-05oz, Width=0.031inch
C3 C5 C9 C11 C15 C17 C21 C22 C28 C? C? C? C? C? C? C? C?: library part CMP-001-00090-1, "Cap Tant Solid 10uF 16V B CASE 10% (3.5 X 2.8 X 1.9mm) Inward L SMD 3528-21 2 Ohm 125C T/R", Case Code (Imperial)=1411, Case Code (Metric)=3528, Dielectric Material=Tantalum, ESR (Equivalent Series Resistance)=2R, Leakage Current=1.6uA, Max Operating Temperature=125°C, Min Operating Temperature=-55°C, Package Quantity=2000, Ripple Current=160mA, Tolerance=10%, Voltage=16V, Case/Package=1411, Construction=Flat, Depth=2.8mm, Dissipation Factor=6%, Features="General Purpose", Height=1.9mm, Height - Seated (Max)=0.083inch, Lead Free="Lead Free", Length=3.5mm, Mounting Technology="Surface Mount,PCB", Packaging="Tape and Reel", Polarity=Polar, Q Factor=6, Radiation Hardening=No, RoHS Compliant=Yes, Series="TANTAMOUNT®, 293D", Termination=SMD/SMT, Voltage Rating=16V, Voltage Rating (DC)=16V, Width=1.9mm
C25 C29: library part CMP-001-00098-1, "MLCC- CAPACITANCE 225", Case Code (Imperial)=0603, Case Code (Metric)=1608, Dielectric=X7R, Max Operating Temperature=125°C, Min Operating Temperature=-55°C, Resistor Type=Ceramic, Tolerance=10%, Voltage Rating=6.3V, Case/Package=0603, Construction=Flat, Depth=0.8mm, Halogen Free="Halogen Free", Height=0.8mm, Lead Free="Lead Free", Length=0.063inch, Mounting Technology="Surface Mount", Packaging="Tape and Reel", Radiation Hardening=No, RoHS Compliant=Yes, Series=CC, Termination=SMD/SMT, Thickness=0.035inch, Voltage Rating (DC)=6.3V, Weight=7.1E-05oz, Width=0.031inch
C26: library part CMP-001-00102-1, "0603 0.22 uF 25 V ±10% Tolerance X7R SMT Multilayer Ceramic Capacitor", Case Code (Imperial)=0603, Case Code (Metric)=1608, Dielectric=X7R, Max Operating Temperature=125°C, Min Operating Temperature=-55°C, Package Quantity=1, Tolerance=10%, Voltage=25V, Case/Package=0603, Construction=Flat, Depth=0.8mm, Height=0.8mm, Lead Free="Lead Free", Length=1.6mm, Material=Ceramic, Mounting Technology="Surface Mount", Packaging="Tape and Reel", Pins=2, Radiation Hardening=No, Reach SVHC Compliant=Yes, RoHS Compliant=Yes, Series=GRM, Termination=SMD/SMT, Thickness=0.035inch, Voltage Rating=25V, Voltage Rating (DC)=25V, Width=0.031inch
D1: library part CMP-004-00035-3, "Dio Tvs Vwm 20V 600W Bidir Smb Rohs Compliant: Yes", Breakdown Voltage=25.5V, Case/Package=DO-214AA, Clamping Voltage=32.4V, Leakage Current=5uA, Max Operating Temperature=150°C, Max Power Dissipation=600W, Max Surge Current=100A, Min Breakdown Voltage=22.2V, Min Operating Temperature=-55°C, Operating Supply Voltage=3.5V, Package Quantity=1, Peak Pulse Current=18.6A, Power Line Protection=No, Resistor Type=Zener, Reverse Standoff Voltage=20V, Test Current=1mA, Diode Type=ZENER, Direction=Bidirectional, Element Configuration=Single, Max Breakdown Voltage=25.5V, Max Reverse Leakage Current=5uA, Mounting Technology="Surface Mount", Number of Bidirectional Channels=1, Number of Channels=1, Number of Elements=1, Packaging="Tape and Reel", Peak Pulse Power=600W, Pins=2, Polarity=Bidirectional, Radiation Hardening=No, Reach SVHC Compliant=Yes, Reverse Breakdown Voltage=22.2V, RoHS Compliant=Yes, Series=SMBJ, Termination=SMD/SMT
J1: library part CMP-002-00079-1, "2.0 x 6.5 mm, 8.0 A, Horizontal, Through Hole, Shielded, Kinked Pins, Dc Power Jack Connector", Current Rating=8A, Flammability Rating="UL94 V-0", Housing Color=Black, Insulation Resistance=100MR, Max Operating Temperature=85°C, Min Operating Temperature=-25°C, Package Quantity=500, Voltage Rating=24V, Connector Type=Jack, Contact Gender=Male, Contact Material=Copper, Contact Plating=Nickel, Gender=Male, Housing Material=Thermoplastic, Lead Free="Lead Free", Mounting Technology="Through Hole", Number of Conductors=2, Orientation=Horizontal, RoHS Compliant=Yes, Series=-, Shielding=Shielded, Termination="Through Hole"
J2 J3 J4 J5: library part CMP-002-00080-2, "Headers & Wire Housings .050 Tiger Eye Cost-Effective Reliable Socket Strip", Color=Black, Max Operating Temperature=125°C, Min Operating Temperature=-55°C, Voltage Rating (AC)=350V, Connector Type=Receptacle, Contact Finish - Mating=GOLD, Contact Material=Bronze, Contact Plating=Gold, Contact Shape=Square, Contact Type="Female Socket", Fastening Type=Pull, Gender=Female, Insulation Color=Black, Insulation Material=Polymer, Mounting Technology="Through Hole", Number of Contacts=20, Number of Positions=20, Number of Rows=2, Packaging=Rail/Tube, Pitch=0.05inch, RoHS Compliant=Yes, Row Spacing=0.05inch, Series="Tiger Eye™ SFC", Termination=Solder
L1: library part CMP-006-00022-1, "Inductor RF Chip Shielded Multi-Layer 4.7uH 10% 10MHz 45Q-Factor 50mA 900mOhm DCR 1206 T/R", Case Code (Imperial)=1206, Case Code (Metric)=3216, Current Rating=50mA, DC Resistance (DCR)=900mR, Max Operating Temperature=125°C, Min Operating Temperature=-55°C, Package Quantity=3000, Self Resonant Frequency=41MHz, Test Frequency=10MHz, Tolerance=10%, Case/Package=1206, Core Material=Ferrite, Depth=1.8mm, Height=1.1mm, Height - Seated (Max)=0.055inch, Lead Free="Lead Free", Length=0.126inch, Max DC Current=50mA, Mounting Technology="Surface Mount", Packaging="Tape and Reel", Q Factor=45, Radiation Hardening=No, RoHS Compliant=Yes, Series=ILSB-1206, Shielding=Shielded, Termination=SMD/SMT, Weight=0.000353oz, Width=1.6mm
LED1: library part CMP-007-00044-1, "Led, Green, T-1 3/4 (5Mm), 522 Nm, 3.4 V, 30 Ma, 10 Cd Rohs Compliant: Yes", Case/Package=Radial, Color=Green, Forward Current=30mA, Forward Voltage=3.4V, Lens Color=Colorless, Max Operating Temperature=85°C, Min Operating Temperature=-40°C, Package Quantity=1, Test Current=20mA, Dominant Wavelength=522nm, Height=8.85mm, Lens Size=5mm, Lens Style=Round,Domed,Circular, Lens Transparency=Clear, Luminous Intensity=10000mcd, Mounting Technology="Through Hole", Packaging=Bulk, RoHS Compliant=Yes, Series=WL-TMRW, Viewing Angle=30°, Wavelength=522nm
MUX1 MUX1_1 MUX2 MUX2_1 MUX3 MUX3_1 MUX4 MUX4_1 MUX5 MUX5_1 MUX6 MUX6_1 MUX7 MUX7_1 MUX8 MUX8_1: library part CMP-015-00012-1, "5-V, 8: 1, 1-channel general-purpose analog multiplexer with 1.8-V input logic 16-TSSOP -40 to 125", RoHS Compliant=Yes
Q1: library part CMP-013-00037-1, "-30V Single P-Channel HEXFET Power MOSFET in a Micro3 package, SOT23-3, RoHS", Case/Package=SOT-23, Continuous Drain Current (ID)=2.3A, Drain to Source Resistance=270mR, Drain to Source Voltage (Vdss)=-30V, Gate to Source Voltage (Vgs)=20V, Input Capacitance=160pF, Max Operating Temperature=150°C, Max Power Dissipation=1.25W, Min Operating Temperature=-55°C, Threshold Voltage=-1.3V, Element Configuration=Single, Halogen Free="Halogen Free", Height=0.04inch, Lead Free="Lead Free", Length=0.119inch, Max Dual Supply Voltage=-30V, Mounting Technology="Surface Mount", Packaging="Cut Tape", Pins=3, Power Dissipation=1.25W, Rds On Max=165mR, Reach SVHC Compliant=Yes, Rise Time=14ns, RoHS Compliant=Yes, Series=HEXFET®, Turn-Off Delay Time=9ns, Turn-On Delay Time=7.5ns, Width=0.055inch
R1: library part CMP-009-00195-2, "Res Thick Film 0603 2.4K Ohm 1% 0.1W(1/10W) ±100ppm/C Pad SMD Automotive T/R", Case Code (Imperial)=0603, Case Code (Metric)=1608, Max Operating Temperature=155°C, Max Power Dissipation=100mW, Min Operating Temperature=-55°C, Ratings=AEC-Q200, Resistor Type="Thick Film", Temperature Coefficient=100ppm/°C, Tolerance=1%, Voltage Rating=50V, Case/Package=0603, Features="Moisture Resistant,Automotive AEC-Q200", Height=0.022inch, Length=0.063inch, Number of Terminations=2, Packaging="Tape and Reel", Power Rating=100mW, RoHS Compliant=Yes, Series=AC, Termination=SMD/SMT, Weight=7.1E-05oz, Width=0.8mm
R2: library part CMP-009-00196-1, "Res Thick Film 0603 5.1K Ohm 1% 1/10W ±100ppm/°C Molded SMD Paper T/R", Case Code (Imperial)=0603, Case Code (Metric)=1608, Max Operating Temperature=155°C, Max Power Dissipation=100mW, Min Operating Temperature=-55°C, Ratings=AEC-Q200, Resistor Type="Thick Film", Temperature Coefficient=100ppm/°C, Tolerance=1%, Voltage Rating=50V, Case/Package=0603, Features="Moisture Resistant,Automotive AEC-Q200", Height=0.45mm, Length=1.6mm, Number of Terminations=2, Packaging="Tape and Reel", Power Rating=100mW, RoHS Compliant=Yes, Series=AC, Termination=SMD/SMT, Weight=7.1E-05oz, Width=0.8mm
R3: library part CMP-009-00200-2, "Res Thick Film 0603 22.1K Ohm 1% 1/10W ±100ppm/°C Molded SMD SMD Paper T/R", Case Code (Imperial)=0603, Case Code (Metric)=1608, Max Operating Temperature=155°C, Max Power Dissipation=100mW, Min Operating Temperature=-55°C, Package Quantity=10, Ratings=AEC-Q200, Resistance Tolerance=1%, Resistor Type="Thick Film", Temperature Coefficient=100ppm/°C, Voltage Rating=75V, Case/Package=0603, Construction=Rectangular, Contact Plating=Tin, Depth=0.85mm, Features="Automotive AEC-Q200", Height=0.45mm, Lead Free="Lead Free", Length=1.55mm, Military Standard=Not, Mounting Technology="Surface Mount", Number of Terminations=2, Packaging="Tape and Reel", Power Rating=100mW, Radiation Hardening=No, RoHS Compliant=Yes, Series=CRCW, Technology="THICK FILM", Termination=SMD/SMT, Tolerance=1%, Voltage Rating (DC)=75V, Weight=7.1E-05oz, Width=0.033inch
R4: library part CMP-009-00199-2, "D11/CRCW0603 100 88K7 1% ET5 e3", Case Code (Imperial)=0603, Case Code (Metric)=1608, Max Operating Temperature=155°C, Max Power Dissipation=100mW, Min Operating Temperature=-55°C, Package Quantity=10000, Resistor Type="Thick Film", Temperature Coefficient=100ppm/°C, Tolerance=1%, Voltage Rating=75V, Case/Package=0603, Construction=Rectangular, Depth=0.85mm, Features="Automotive AEC-Q200", Height=0.02inch, Lead Free="Lead Free", Length=0.061inch, Military Standard=Not, Number of Terminations=2, Packaging="Tape and Reel", Power Rating=100mW, RoHS Compliant=Yes, Series=CRCW, Termination=SMD/SMT, Weight=7.1E-05oz, Width=0.85mm
R5 R5_1 R6 R6_1 R7 R7_1 R8 R8_1 R9 R9_1 R10 R10_1 R11 R11_1 R12 R12_1 R13 R13_1 R14 R14_1 R15 R15_1 R16 R16_1 R17 R17_1 R18 R18_1 R19 R19_1 R20 R20_1 R21 R21_1 R22 R22_1 R23 R23_1 R24 R24_1 R25 R25_1 R26 R26_1 R27 R27_1 R28 R28_1: library part CMP-009-00178-1, "Res High precision Thin Film 0603 10K Ohm 0.1% 1/10W ±25ppm/°C Molded SMD Paper T/R", Case Code (Imperial)=0603, Case Code (Metric)=1608, Max Operating Temperature=155°C, Max Power Dissipation=100mW, Min Operating Temperature=-55°C, Package Quantity=5000, Resistor Type="Thin Film", Temperature Coefficient=25ppm/°C, Voltage Rating=75V, Case/Package=0603, Construction=Rectangular, Depth=0.8mm, Features="Moisture Resistant", Height=0.022inch, Lead Free="Lead Free", Length=0.063inch, Military Standard=Not, Number of Terminations=2, Packaging="Tape and Reel", Power Rating=100mW, RoHS Compliant=Yes, Series=RT, Technology="THIN FILM", Termination=SMD/SMT, Voltage Rating (DC)=75V, Weight=7.1E-05oz, Width=0.8mm, Working Voltage=75V
U1 U1_1 U2 U2_1 U3 U3_1 U4 U4_1 U5 U5_1 U6 U6_1 U7 U7_1 U8 U8_1: library part CMP-014-00010-7, "MCP6N11 Series Single Channel 500 KHz 5.5 V Instrumentation Amplifier - SOIC-8", Case/Package=SOIC, Input Bias Current=10pA, Input Offset Voltage (Vos)=350uV, Max Operating Temperature=125°C, Max Supply Current=800uA, Max Supply Voltage=5.5V, Min Operating Temperature=-40°C, Min Supply Voltage=1.8V, Package Quantity=100, Power Supply Rejection Ratio (PSRR)=86dB, Bandwidth=500kHz, Common Mode Rejection Ratio=86dB, Gain Bandwidth Product=35MHz, Height=1.25mm, Input Offset Voltage-Max=350uV, Lead Free="Lead Free", Length=4.9mm, Mounting Technology="Surface Mount", Nominal Supply Current=800uA, Number of Amplifiers=1, Number of Channels=1, Number of Circuits=1, Number of Elements=2, Packaging=Rail/Tube, Pins=8, Radiation Hardening=No, Reach SVHC Compliant=Yes, RoHS Compliant=Yes, Slew Rate=6V/µs, Slew Rate-Nom=9V/µs, Supply Current=800uA, Unity Gain Bandwidth Product=35MHz, Width=3.9mm
VREF1: library part CMP-019-00066-2, "V-Ref Precision 3.3V 20mA 6-Pin SOT-23 T/R", Case/Package=SOT-23-6, Max Operating Temperature=125°C, Min Operating Temperature=-40°C, Min Output Voltage=3.3V, Operating Supply Current=550uA, Output Current=20mA, Temperature Coefficient=50ppm/°C, Tolerance=0.08%, Mounting Technology="Surface Mount", Output Type=Fixed, Packaging="Cut Tape", Reference Type=Series, RoHS Compliant=Yes, Series=-
VREF2: library part CMP-019-00064-2, "MCP1501 Series 1.8 V 20 mA High Precision Buffered Voltage Reference SOT-23-6", Case/Package=SOT-23-6, Max Operating Temperature=125°C, Min Operating Temperature=-40°C, Min Output Voltage=1.8V, Operating Supply Current=550uA, Output Current=20mA, Temperature Coefficient=50ppm/°C, Tolerance=0.08%, Mounting Technology="Surface Mount", Output Type=Fixed, Packaging="Cut Tape", Reference Type=Series, RoHS Compliant=Yes, Series=-
VREG1: "Power Supply", Manufacturer_Name="Texas Instruments", Mouser Part Number=595-MR50410YFQDBVRQ1, Supplier Part Number 1=296-LMR50410YFQDBVRQ1CT-ND, Arrow Part Number=LMR50410YFQDBVRQ1, Arrow Price/Stock=https://www.arrow.com/en/products/lmr50410yfqdbvrq1/texas-instruments?region=nac, Datasheet Link=https://www.ti.com/product/LMR50410-Q1, Height=1.45mm, Manufacturer_Part_Number=LMR50410YFQDBVRQ1, Mouser Price/Stock=https://www.mouser.co.uk/ProductDetail/Texas-Instruments/LMR50410YFQDBVRQ1?qs=81r%252BiQLm7BRUAgUFqYZycA%3D%3D, Supplier 1=Digi-Key

## Nets (pads, with @x,y where several pads share a name; then routed paths per layer and width w, separated by ;. In a path a pad name is that pad's centre, name@x,y a point inside that pad or via, vN(x,y) a via of type N, cw(c..) or ccw(c..) an arc to the next point about the centre after c; other vN are vias at no path point)
A1: J2.3 MUX1.4
A2: J2.5 MUX1.5
A3: J2.7 MUX1.6
A4: J2.9 MUX1.7
A5: J2.11 MUX1.12
A6: J2.13 MUX1.11
A7: J2.15 MUX1.10
A8: J2.17 MUX1.9
B1: J2.2 MUX2.4
B2: J2.4 MUX2.5
B3: J2.6 MUX2.6
B4: J2.8 MUX2.7
B5: J2.10 MUX2.12
B6: J2.12 MUX2.11
B7: J2.14 MUX2.10
B8: J2.16 MUX2.9
C1: J3.3 MUX3.4
C2: J3.5 MUX3.5
C3: J3.7 MUX3.6
C4: J3.9 MUX3.7
C5: J3.11 MUX3.12
C6: J3.13 MUX3.11
C7: J3.15 MUX3.10
C8: J3.17 MUX3.9
D0: MUX1.1 MUX2.1 MUX3.1 MUX4.1 MUX5.1 MUX6.1 MUX7.1 MUX8.1
D1: MUX1.16 MUX2.16 MUX3.16 MUX4.16 MUX5.16 MUX6.16 MUX7.16 MUX8.16
D2: MUX1.15 MUX2.15 MUX3.15 MUX4.15 MUX5.15 MUX6.15 MUX7.15 MUX8.15
D3: ADC?.6@285.283,62.246
D4: ADC?.6@243.627,62.246
D5: ADC?.6@201.971,62.246
D6: ADC?.6@160.315,62.246
D7: ADC?.6@181.143,62.246
D8: ADC?.6@222.799,62.246
D9: ADC?.6@264.455,62.246
D10: ADC?.6@305.984,62.246
E1: J3.2 MUX4.4
E2: J3.4 MUX4.5
E3: J3.6 MUX4.6
E4: J3.8 MUX4.7
E5: J3.10 MUX4.12
E6: J3.12 MUX4.11
E7: J3.14 MUX4.10
E8: J3.16 MUX4.9
F1: J4.3 MUX5.4
F2: J4.5 MUX5.5
F3: J4.7 MUX5.6
F4: J4.9 MUX5.7
F5: J4.11 MUX5.12
F6: J4.13 MUX5.11
F7: J4.15 MUX5.10
F8: J4.17 MUX5.9
G1: J4.2 MUX6.4
G2: J4.4 MUX6.5
G3: J4.6 MUX6.6
G4: J4.8 MUX6.7
G5: J4.10 MUX6.12
G6: J4.12 MUX6.11
G7: J4.14 MUX6.10
G8: J4.16 MUX6.9
GND: ADC?.4 ADC?.5 C26.2 C28.1 C30.1 C31.1 C32.1 C33.1 C34.1 C35.1 C36.1 C37.1 C38.1 C39.1 C40.1 C41.1 C42.1 C43.1 C44.1 C45.1 C?.1@147.828,59.87 C?.1@164.211,59.87 C?.1@168.106,64.262 C?.1@172.424,64.262 C?.1@185.039,59.87 C?.1@205.063,64.262 C?.1@210.185,59.87 C?.1@214.08,64.262 C?.1@226.695,59.87 C?.1@246.592,64.262 C?.1@251.841,59.87 C?.1@255.736,64.262 C?.1@268.224,59.87 C?.1@288.248,64.262 C?.1@293.497,59.87 C?.1@297.392,64.262 C?.2@143.933,64.262 C?.2@153.077,64.262 C?.2@190.288,64.262 C?.2@194.606,64.262 C?.2@231.817,64.262 C?.2@236.262,64.262 C?.2@273.473,64.262 C?.2@277.918,64.262 D1.2 J1.1 J1.3 J1.4 J2.1 J2.18 J2.19 J2.20 J3.1 J3.18 J3.19 J3.20 J4.1 J4.18 J4.19 J4.20 J5.1 J5.18 J5.19 J5.20 LED1.1 MUX1.14 MUX2.14 MUX3.14 MUX4.14 MUX5.14 MUX6.14 MUX7.14 MUX8.14 Q1.1 R2.1 R3.2 R6.2 R9.2 R12.2 R15.2 R18.2 R21.2 R24.2 R27.2 U1.4 U1.5 U2.4 U2.5 U3.4 U3.5 U4.4 U4.5 U5.4 U5.5 U6.4 U6.5 U7.4 U7.5 U8.4 U8.5 VREG1.2
H1: J5.3 MUX7.4
H2: J5.5 MUX7.5
H3: J5.7 MUX7.6
H4: J5.9 MUX7.7
H5: J5.11 MUX7.12
H6: J5.13 MUX7.11
H7: J5.15 MUX7.10
H8: J5.17 MUX7.9
I1: J5.2 MUX8.4
I2: J5.4 MUX8.5
I3: J5.6 MUX8.6
I4: J5.8 MUX8.7
I5: J5.10 MUX8.12
I6: J5.12 MUX8.11
I7: J5.14 MUX8.10
I8: J5.16 MUX8.9
MISO: ADC?.7
NetADC?_1: ADC?.1 C?.2@147.828,63.32 C?.2@164.211,63.32 C?.2@185.039,63.32 C?.2@210.185,63.32 C?.2@226.695,63.32 C?.2@251.841,63.32 C?.2@268.224,63.32 C?.2@293.497,63.32 R5.1 R7.1 R8.1 R10.1 R11.1 R13.1 R14.1 R16.1 R17.1 R19.1 R20.1 R22.1 R23.1 R25.1 R26.1 R28.1 VREF1.1
NetADC?_2: ADC?.2 C?.1@151.723,64.262 C?.1@188.934,64.262 C?.1@230.463,64.262 C?.1@272.119,64.262 C?.2@169.46,64.262 C?.2@215.434,64.262 C?.2@257.09,64.262 C?.2@298.746,64.262 VREF2.1
NetADC?_3: ADC?.3@155.915,63.246 U8.1 U8.6
NetADC?_9: ADC?.9 ADC?.10 C25.2 C28.2 C29.2 C30.2 C31.2 C32.2 C33.2 C34.2 C35.2 C36.2 C37.2 C38.2 C39.2 C40.2 C41.2 C42.2 C43.2 C44.2 C45.2 C?.1@142.579,64.262 C?.1@193.252,64.262 C?.1@234.908,64.262 C?.1@276.564,64.262 C?.2@173.778,64.262 C?.2@206.417,64.262 C?.2@247.946,64.262 C?.2@289.602,64.262 L1.2 MUX1.2 MUX1.13 MUX2.2 MUX2.13 MUX3.2 MUX3.13 MUX4.2 MUX4.13 MUX5.2 MUX5.13 MUX6.2 MUX6.13 MUX7.2 MUX7.13 MUX8.2 MUX8.13 R1.2 R4.1 U1.7 U1.8 U2.7 U2.8 U3.7 U3.8 U4.7 U4.8 U5.7 U5.8 U6.7 U6.8 U7.7 U7.8 U8.7 U8.8 VREF1.2 VREF1.3 VREF1.4 VREF1.5 VREF2.4 VREF2.6
NetC25_1: C25.1 VREF1.6
NetC26_1: C26.1 VREG1.4 VREG1.5
NetC27_1: C27.1 L1.1 VREG1.6
NetC27_2: C27.2 VREG1.1
NetC29_1: C29.1 VREF2.2 VREF2.3 VREF2.5
NetD1_1: D1.1 J1.2 Q1.3
NetLED1_2: LED1.2 R1.1 R2.2
NetMUX1_8: MUX1.8 R7.2 U1.3
NetMUX2_8: MUX2.8 R10.2 U2.3
NetMUX3_8: MUX3.8 R13.2 U3.3
NetMUX4_8: MUX4.8 R16.2 U4.3
NetMUX5_8: MUX5.8 R19.2 U5.3
NetMUX6_8: MUX6.8 R22.2 U6.3
NetMUX7_8: MUX7.8 R25.2 U7.3
NetMUX8_8: MUX8.8 R28.2 U8.3
NetQ1_2: Q1.2
NetR3_1: R3.1 R4.2 VREG1.3
NetR5_2: R5.2 R6.1 U1.2
NetR8_2: R8.2 R9.1 U2.2
NetR11_2: R11.2 R12.1 U3.2
NetR14_2: R14.2 R15.1 U4.2
NetR17_2: R17.2 R18.1 U5.2
NetR20_2: R20.2 R21.1 U6.2
NetR23_2: R23.2 R24.1 U7.2
NetR26_2: R26.2 R27.1 U8.2
SCLK: ADC?.8
pads on no net: ADC1.1 ADC1.2 ADC1.3 ADC1.4 ADC1.5 ADC1.6 ADC1.7 ADC1.8 ADC1.9 ADC1.10 ADC2.1 ADC2.2 ADC2.3 ADC2.4 ADC2.5 ADC2.6 ADC2.7 ADC2.8 ADC2.9 ADC2.10 ADC3.1 ADC3.2 ADC3.3 ADC3.4 ADC3.5 ADC3.6 ADC3.7 ADC3.8 ADC3.9 ADC3.10 ADC4.1 ADC4.2 ADC4.3 ADC4.4 ADC4.5 ADC4.6 ADC4.7 ADC4.8 ADC4.9 ADC4.10 ADC5.1 ADC5.2 ADC5.3 ADC5.4 ADC5.5 ADC5.6 ADC5.7 ADC5.8 ADC5.9 ADC5.10 ADC6.1 ADC6.2 ADC6.3 ADC6.4 ADC6.5 ADC6.6 ADC6.7 ADC6.8 ADC6.9 ADC6.10 ADC7.1 ADC7.2 ADC7.3 ADC7.4 ADC7.5 ADC7.6 ADC7.7 ADC7.8 ADC7.9 ADC7.10 ADC8.1 ADC8.2 ADC8.3 ADC8.4 ADC8.5 ADC8.6 ADC8.7 ADC8.8 ADC8.9 ADC8.10 ADC?.3@176.743,63.246 ADC?.3@197.571,63.246 ADC?.3@218.399,63.246 ADC?.3@239.227,63.246 ADC?.3@260.055,63.246 ADC?.3@280.883,63.246 ADC?.3@301.584,63.246 C1.1 C1.2 C2.1 C2.2 C3.1 C3.2 C4.1 C4.2 C5.1 C5.2 C6.1 C6.2 C7.1 C7.2 C8.1 C8.2 C9.1 C9.2 C10.1 C10.2 C11.1 C11.2 C12.1 C12.2 C13.1 C13.2 C14.1 C14.2 C15.1 C15.2 C16.1 C16.2 C17.1 C17.2 C18.1 C18.2 C19.1 C19.2 C20.1 C20.2 C21.1 C21.2 C22.1 C22.2 C23.1 C23.2 C24.1 C24.2 C30_1.1 C30_1.2 C31_1.1 C31_1.2 C32_1.1 C32_1.2 C33_1.1 C33_1.2 C34_1.1 C34_1.2 C35_1.1 C35_1.2 C36_1.1 C36_1.2 C37_1.1 C37_1.2 C38_1.1 C38_1.2 C39_1.1 C39_1.2 C40_1.1 C40_1.2 C41_1.1 C41_1.2 C42_1.1 C42_1.2 C43_1.1 C43_1.2 C44_1.1 C44_1.2 C45_1.1 C45_1.2 Designator26.01 Designator26.02 Designator26.03 Designator26.04 Designator26.05 Designator26.06 Designator26.07 Designator26.08 Designator26.09 Designator26.10 Designator26.11 Designator26.12 Designator26.13 Designator26.14 Designator26.15 Designator26.16 Designator26.17 Designator26.18 Designator26.19 Designator26.20 Designator26_1.01 Designator26_1.02 Designator26_1.03 Designator26_1.04 Designator26_1.05 Designator26_1.06 Designator26_1.07 Designator26_1.08 Designator26_1.09 Designator26_1.10 Designator26_1.11 Designator26_1.12 Designator26_1.13 Designator26_1.14 Designator26_1.15 Designator26_1.16 Designator26_1.17 Designator26_1.18 Designator26_1.19 Designator26_1.20 Designator27.01 Designator27.02 Designator27.03 Designator27.04 Designator27.05 Designator27.06 Designator27.07 Designator27.08 Designator27.09 Designator27.10 Designator27.11 Designator27.12 Designator27.13 Designator27.14 Designator27.15 Designator27.16 Designator27.17 Designator27.18 Designator27.19 Designator27.20 Designator27_1.01 Designator27_1.02 Designator27_1.03 Designator27_1.04 Designator27_1.05 Designator27_1.06 Designator27_1.07 Designator27_1.08 Designator27_1.09 Designator27_1.10 Designator27_1.11 Designator27_1.12 Designator27_1.13 Designator27_1.14 Designator27_1.15 Designator27_1.16 Designator27_1.17 Designator27_1.18 Designator27_1.19 Designator27_1.20 Designator28.01 Designator28.02 Designator28.03 Designator28.04 Designator28.05 Designator28.06 Designator28.07 Designator28.08 Designator28.09 Designator28.10 Designator28.11 Designator28.12 Designator28.13 Designator28.14 Designator28.15 Designator28.16 Designator28.17 Designator28.18 Designator28.19 Designator28.20 J1.5 J2. J3. J4. J5. MUX1.3 MUX1_1.1 MUX1_1.2 MUX1_1.3 MUX1_1.4 MUX1_1.5 MUX1_1.6 MUX1_1.7 MUX1_1.8 MUX1_1.9 MUX1_1.10 MUX1_1.11 MUX1_1.12 MUX1_1.13 MUX1_1.14 MUX1_1.15 MUX1_1.16 MUX2.3 MUX2_1.1 MUX2_1.2 MUX2_1.3 MUX2_1.4 MUX2_1.5 MUX2_1.6 MUX2_1.7 MUX2_1.8 MUX2_1.9 MUX2_1.10 MUX2_1.11 MUX2_1.12 MUX2_1.13 MUX2_1.14 MUX2_1.15 MUX2_1.16 MUX3.3 MUX3_1.1 MUX3_1.2 MUX3_1.3 MUX3_1.4 MUX3_1.5 MUX3_1.6 MUX3_1.7 MUX3_1.8 MUX3_1.9 MUX3_1.10 MUX3_1.11 MUX3_1.12 MUX3_1.13 MUX3_1.14 MUX3_1.15 MUX3_1.16 MUX4.3 MUX4_1.1 MUX4_1.2 MUX4_1.3 MUX4_1.4 MUX4_1.5 MUX4_1.6 MUX4_1.7 MUX4_1.8 MUX4_1.9 MUX4_1.10 MUX4_1.11 MUX4_1.12 MUX4_1.13 MUX4_1.14 MUX4_1.15 MUX4_1.16 MUX5.3 MUX5_1.1 MUX5_1.2 MUX5_1.3 MUX5_1.4 MUX5_1.5 MUX5_1.6 MUX5_1.7 MUX5_1.8 MUX5_1.9 MUX5_1.10 MUX5_1.11 MUX5_1.12 MUX5_1.13 MUX5_1.14 MUX5_1.15 MUX5_1.16 MUX6.3 MUX6_1.1 MUX6_1.2 MUX6_1.3 MUX6_1.4 MUX6_1.5 MUX6_1.6 MUX6_1.7 MUX6_1.8 MUX6_1.9 MUX6_1.10 MUX6_1.11 MUX6_1.12 MUX6_1.13 MUX6_1.14 MUX6_1.15 MUX6_1.16 MUX7.3 MUX7_1.1 MUX7_1.2 MUX7_1.3 MUX7_1.4 MUX7_1.5 MUX7_1.6 MUX7_1.7 MUX7_1.8 MUX7_1.9 MUX7_1.10 MUX7_1.11 MUX7_1.12 MUX7_1.13 MUX7_1.14 MUX7_1.15 MUX7_1.16 MUX8.3 MUX8_1.1 MUX8_1.2 MUX8_1.3 MUX8_1.4 MUX8_1.5 MUX8_1.6 MUX8_1.7 MUX8_1.8 MUX8_1.9 MUX8_1.10 MUX8_1.11 MUX8_1.12 MUX8_1.13 MUX8_1.14 MUX8_1.15 MUX8_1.16 R5_1.1 R5_1.2 R6_1.1 R6_1.2 R7_1.1 R7_1.2 R8_1.1 R8_1.2 R9_1.1 R9_1.2 R10_1.1 R10_1.2 R11_1.1 R11_1.2 R12_1.1 R12_1.2 R13_1.1 R13_1.2 R14_1.1 R14_1.2 R15_1.1 R15_1.2 R16_1.1 R16_1.2 R17_1.1 R17_1.2 R18_1.1 R18_1.2 R19_1.1 R19_1.2 R20_1.1 R20_1.2 R21_1.1 R21_1.2 R22_1.1 R22_1.2 R23_1.1 R23_1.2 R24_1.1 R24_1.2 R25_1.1 R25_1.2 R26_1.1 R26_1.2 R27_1.1 R27_1.2 R28_1.1 R28_1.2 U1.1 U1.6 U1_1.1 U1_1.2 U1_1.3 U1_1.4 U1_1.5 U1_1.6 U1_1.7 U1_1.8 U2.1 U2.6 U2_1.1 U2_1.2 U2_1.3 U2_1.4 U2_1.5 U2_1.6 U2_1.7 U2_1.8 U3.1 U3.6 U3_1.1 U3_1.2 U3_1.3 U3_1.4 U3_1.5 U3_1.6 U3_1.7 U3_1.8 U4.1 U4.6 U4_1.1 U4_1.2 U4_1.3 U4_1.4 U4_1.5 U4_1.6 U4_1.7 U4_1.8 U5.1 U5.6 U5_1.1 U5_1.2 U5_1.3 U5_1.4 U5_1.5 U5_1.6 U5_1.7 U5_1.8 U6.1 U6.6 U6_1.1 U6_1.2 U6_1.3 U6_1.4 U6_1.5 U6_1.6 U6_1.7 U6_1.8 U7.1 U7.6 U7_1.1 U7_1.2 U7_1.3 U7_1.4 U7_1.5 U7_1.6 U7_1.7 U7_1.8 U8_1.1 U8_1.2 U8_1.3 U8_1.4 U8_1.5 U8_1.6 U8_1.7 U8_1.8
copper on no net: | length 241.6
  Top Layer w0.254: 137.383,85.598 ccw(c98.933,85.598) 137.383,85.598

## Polygon pours and split planes (outlines as drawn)
no net on Int1 (GND) (split plane): 281 vertices, not listed, extent 60.991,47.656 136.875,123.54
no net on Int2 (PWR) (split plane): 281 vertices, not listed, extent 60.991,47.656 136.875,123.54

## Text inside footprints (layer, text, board x,y; h text height)
LED1: Top Overlay "K" at 240.157,53.34 h0.76; Mechanical 15 "K" at 240.157,53.34 h0.76